# Altium PCB EXT_M_V1.PcbDoc
Units mm, origin at the board's own origin, x right, y up, seen from the top; angles counter-clockwise.
Board outline 28.17 x 19 mm, 2 copper layers (Top Layer, Bottom Layer); 3 components, 21 nets, 70 pads, 0 vias.
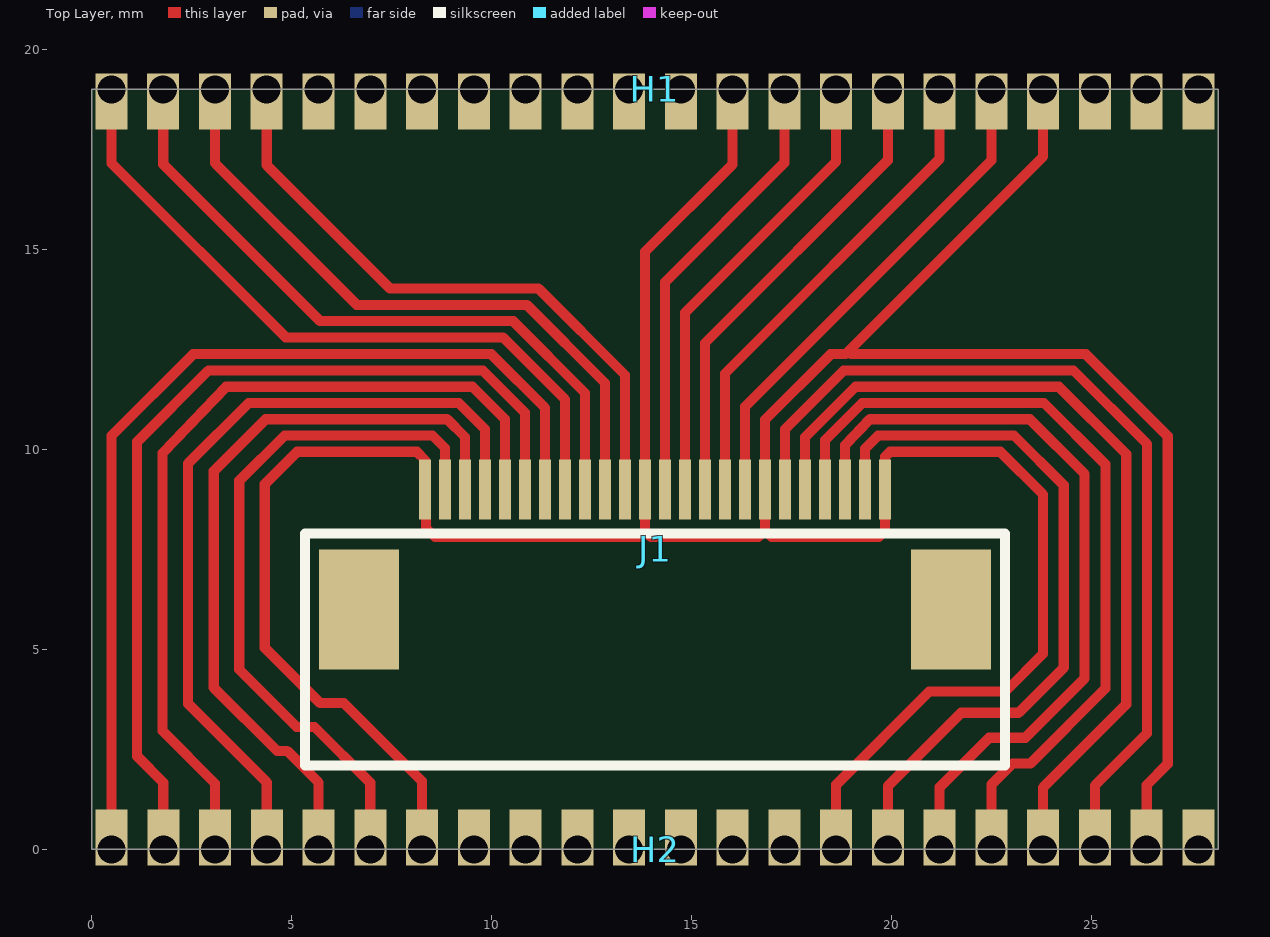
[diagram p0: Top Layer view]
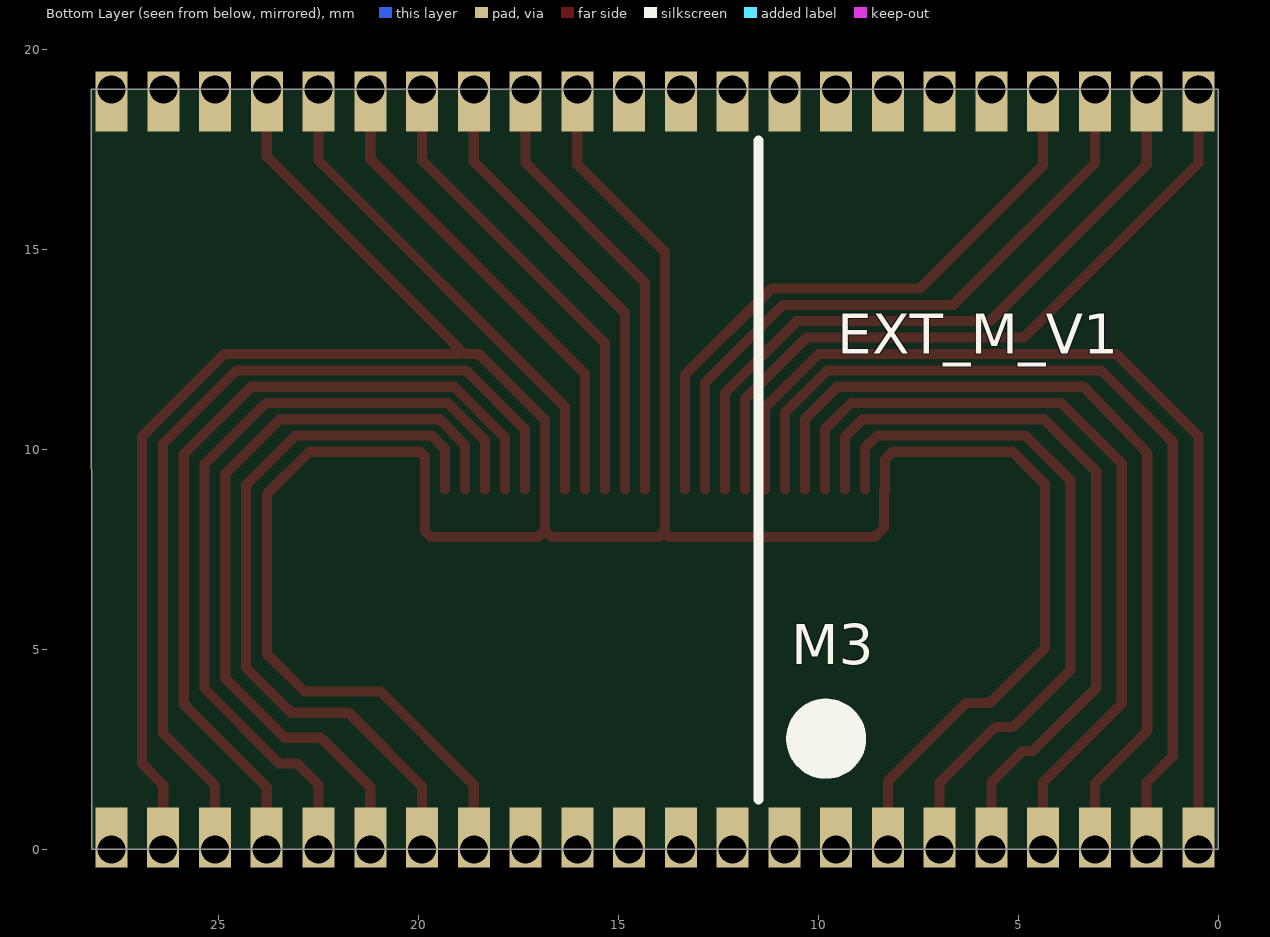
[diagram p1: Bottom Layer view, seen from below]

## Layer stack, top to bottom
Top Solder: solder mask 0.0102, Solder Resist, Dk 3.5
Top Layer: signal copper 0.0356
Dielectric 1: dielectric 0.32, FR-4, Dk 4.8
Bottom Layer: signal copper 0.0356
Bottom Solder: solder mask 0.0102, Solder Resist, Dk 3.5

## Board outline
0,0 0,19 28.173,19 28.168,0

## Design rules (kind name [scope] priority, off if disabled: settings)
AssemblyTestPointUsage SilkToBoardRegionClearance_1 [All] p2:
AssemblyTestPointUsage SilkToBoardRegionClearance [All] p3:
Clearance [All] p1: gap=0.152 ignorepadtopadclearanceinfootprint=FALSE except(0: Arc-Hole Track-Hole SMDPad-Hole THPad-Hole Via-Hole Fill-Hole Poly-Hole Region-Hole Text-Hole)
HoleSize [All] p1: absolutevalues=TRUE maxlimit=6.35 minlimit=0.3 maxpercent=80.000 minpercent=20.000
MatchedLengths DiffPair_DIFF100MatchedLengths [InDifferentialPairClass('DIFF100')] p1: tolerance=0.152 checknetsindiffpair=TRUE checkdiffpairvsdiffpair=FALSE checkxsignals=FALSE checkothers=FALSE usedelayunits=FALSE
MinimumSolderMaskSliver [All] p1: minsoldermaskwidth=0.1
MinimumSolderMaskSliver SilkscreenOverComponentPads_2 [All] p2: minsoldermaskwidth=0.254
MinimumSolderMaskSliver SilkToSolderMaskClearance_1 [IsPad] p3: minsoldermaskwidth=0.254
MinimumSolderMaskSliver SilkscreenOverComponentPads_1 [All] p4: minsoldermaskwidth=0.254
MinimumSolderMaskSliver SilkToSolderMaskClearance [IsPad] p5: minsoldermaskwidth=0.254
MinimumSolderMaskSliver SilkscreenOverComponentPads [All] p6: minsoldermaskwidth=0.254
PolygonConnect [All] p1: connectstyle=Direct reliefconductorwidth=0.254 reliefentries=4 polygonreliefangle="90 Angle" airgapwidth=0.254
RoomDefinition EXT_M_V1 [InComponentClass('EXT_M_V1')] p1: confinementstyle=ConfineIn formatcopy=TRUE lockcomponents=FALSE outline -0.102,-0.559 28.359,-0.559 28.359,19.71 -0.102,19.71
RoutingVias [All] p1: holewidth=0.305 width=0.635 viastyle="Through Hole" minholewidth=0.305 minwidth=0.635 maxholewidth=0.711 maxwidth=1.27
SilkToBoardRegionClearance SilkToBoardRegionClearance_2 [All] p1:
SilkToSolderMaskClearance SilkToSolderMaskClearance_2 [IsPad] p1: minsilkscreentomaskgap=0.254 clearancetoexposedcopper=TRUE
SolderMaskExpansion [All] p1: expansion=0.102
Width [All] p1: maxlimit=2.54 minlimit=0.152 preferedwidth=0.254
26 further rules are at their usual default settings.

## Components (designator, comment, footprint, x,y, rotation, side; value= is the part's Value field where it differs from the comment)
H1 "CASTELLATED 22P" "CASTELLATED 22P" 27.67,19 r180 top locked
H2 "CASTELLATED 22P" "CASTELLATED 22P" 0.5,0 r0 top locked
J1 "FCC 24pin 0.5mm pitch" FCC_24P_0.5MM 8.337,9 r0 top locked

## Footprints (in the part's own frame and the unit in brackets; to place one, negate y for a bottom-side part, rotate by r counter-clockwise, add the part's x,y. Pads: shape width x height; smd on the part's side, far side on the other; paste and mask are expansions set on the pad)
"CASTELLATED 22P" [mm]
  rect 0.8x1.4 / inner rect 0.8x1.5 / far side rect 0.8x1.5 hole 0.7 copper offset 0,0.3: 1(0,0) 2(1.294,0) 3(2.588,0) 4(3.881,0) 5(5.175,0) 6(6.469,0) 7(7.762,0) 8(9.056,0) 9(10.35,0) 10(11.644,0) 11(12.938,0) 12(14.232,0) 13(15.526,0) 14(16.82,0) 15(18.114,0) 16(19.408,0) 17(20.702,0) 18(21.996,0) 19(23.29,0) 20(24.584,0) 21(25.878,0) 22(27.172,0)
FCC_24P_0.5MM [mm]
  rect 0.3x1.5 smd: 1(0,0) 2(0.5,0) 3(1,0) 4(1.5,0) 5(2,0) 6(2.5,0) 7(3,0) 8(3.5,0) 9(4,0) 10(4.5,0) 11(5,0) 12(5.5,0) 13(6,0) 14(6.5,0) 15(7,0) 16(7.5,0) 17(8,0) 18(8.5,0) 19(9,0) 20(9.5,0) 21(10,0) 22(10.5,0) 23(11,0) 24(11.5,0)
  rect 2x3 smd: A(-1.65,-3) A(13.15,-3)
  silkscreen extent -3,-6.9 14.5,-1.1

## Part data
J1: library part FCC_24P_0.5MM

## Nets (pads, with @x,y where several pads share a name; then routed paths per layer and width w, separated by ;. In a path a pad name is that pad's centre, name@x,y a point inside that pad or via, vN(x,y) a via of type N, cw(c..) or ccw(c..) an arc to the next point about the centre after c; other vN are vias at no path point)
B1: H2.5 J1.3 | length 19
  Top Layer w0.254: H2.5 5.675,1.678 4.889,2.464 4.635,2.464 3.054,4.045 3.054,9.455 4.356,10.757 8.89,10.757 9.337,10.31 J1.3
B2: H2.6 J1.2 | length 17.6
  Top Layer w0.254: H2.6 6.969,1.667 5.575,3.061 5.131,3.061 3.692,4.499 3.692,9.217 4.826,10.351 8.522,10.351 8.837,10.035 J1.2
B3: H2.2 J1.6 | length 23.3
  Top Layer w0.254: H2.2 1.794,1.673 1.138,2.329 1.138,10.194 2.921,11.976 9.779,11.976 10.837,10.918 J1.6
B4: H2.4 J1.4 | length 20.3
  Top Layer w0.254: H2.4 4.381,1.677 2.415,3.643 2.415,9.652 3.927,11.163 9.182,11.163 9.837,10.508 J1.4
B5: H2.3 J1.5 | length 21.8
  Top Layer w0.254: H2.3 3.088,1.65 1.777,2.96 1.777,9.915 3.369,11.57 9.525,11.57 10.337,10.758 J1.5
GND: H1.4 H1.10 H2.7 H2.15 H2.21 J1.1 J1.12 J1.18 J1.24 | length 93
  Top Layer w0.254: H2.7 8.263,1.707 6.312,3.658 5.715,3.658 4.331,5.042 4.331,9.131 5.143,9.944 8.132,9.944 8.337,9.739 J1.1 8.36,8.977 8.36,8.036 8.585,7.81 13.737,7.81 13.837,7.91 13.837,7.956 ; H1.10 16.026,17.131 13.837,14.942 J1.12 13.837,7.956 ; H2.15 18.614,1.622 20.942,3.95 22.847,3.95 23.787,4.889 23.787,8.877 22.72,9.944 19.964,9.944 19.837,9.817 J1.24 19.837,7.963 19.685,7.81 16.999,7.81 16.837,7.972 ; 18.986,12.383 24.854,12.383 26.905,10.331 26.905,2.14 26.378,1.613 H2.21 ; H1.4 23.789,17.324 18.847,12.383 18.479,12.383 16.837,10.741 J1.18 16.837,7.972 ; 13.837,7.956 13.983,7.81 16.675,7.81 16.837,7.972
M2_D1: H2.16 J1.23 | length 18.4
  Top Layer w0.254: J1.23 19.337,10.02 19.667,10.351 23.063,10.351 24.307,9.107 24.307,4.546 23.177,3.416 21.742,3.416 19.908,1.582 H2.16
M2_D2: H2.17 J1.22 | length 19.4
  Top Layer w0.254: J1.22 18.837,10.111 19.46,10.757 23.457,10.757 24.826,9.387 24.826,4.278 23.343,2.794 22.441,2.794 21.202,1.555 H2.17
M2_D3: H2.18 J1.21 | length 20.6
  Top Layer w0.254: J1.21 18.337,10.234 19.266,11.163 23.812,11.163 25.346,9.63 25.346,4.34 ; H2.18 22.496,1.617 23.025,2.146 23.47,2.146 25.346,4.023 25.346,4.34 ; 25.349,4.572 25.349,4.343 25.346,4.34
M2_D4: H2.19 J1.20 | length 21.3
  Top Layer w0.254: J1.20 17.837,10.309 19.098,11.57 24.181,11.57 25.866,9.885 25.866,3.628 23.79,1.552 H2.19
M2_D5: H2.20 J1.19 | length 22.6
  Top Layer w0.254: J1.19 17.337,10.508 18.805,11.976 24.549,11.976 26.386,10.14 26.386,2.903 25.084,1.602 H2.20
M2_D6: H1.9 J1.13 | length 11.2
  Top Layer w0.254: J1.13 14.337,14.121 ; 14.337,14.181 17.32,17.164 H1.9
M2_D7: H1.8 J1.14 | length 11.6
  Top Layer w0.254: J1.14 14.837,13.421 18.614,17.198 H1.8
M2_D8: H1.7 J1.15 | length 11.9
  Top Layer w0.254: J1.15 15.337,12.66 19.908,17.231 ; 19.908,17.25 H1.7
M2_D9: H1.6 J1.16 | length 12.2
  Top Layer w0.254: J1.16 15.837,11.9 21.201,17.264 H1.6
M2_D10: H1.5 J1.17 | length 12.6
  Top Layer w0.254: J1.17 16.337,11.066 22.495,17.225 H1.5
M3_D1: H1.21 J1.9 | length 17.2
  Top Layer w0.254: H1.21 1.792,17.131 5.715,13.208 10.541,13.208 12.337,11.412 J1.9
M3_D2: H1.22 J1.8 | length 17.9
  Top Layer w0.254: H1.22 0.498,17.155 4.851,12.802 10.287,12.802 11.837,11.252 J1.8
M3_D7: H2.1 J1.7 | length 24.6
  Top Layer w0.254: H2.1 0.5,10.343 2.54,12.383 9.995,12.383 11.337,11.04 J1.7
VCC2: H1.19 J1.11 | length 15.9
  Top Layer w0.254: H1.19 4.38,17.109 7.468,14.021 11.176,14.021 13.337,11.86 J1.11
VCC3: H1.20 J1.10 | length 16.5
  Top Layer w0.254: H1.20 3.086,17.158 6.629,13.614 10.884,13.614 12.837,11.661 J1.10
pads on no net: H1.1 H1.2 H1.3 H1.11 H1.12 H1.13 H1.14 H1.15 H1.16 H1.17 H1.18 H2.8 H2.9 H2.10 H2.11 H2.12 H2.13 H2.14 H2.22 J1.A

## Polygon pours and split planes (outlines as drawn)
no net on Bottom Layer "NONET_L02_P000" (solid, pour order 0): 0.254,18.161
no net on Top Layer "NONET_L01_P006" (solid, pour order 6): -0.102,-0.559

## Silkscreen, mask and mechanical layers (free items; w line width, h text height)
Bottom Overlay:
  circle w1: c9.804,2.769 r0.5
  lines w0.254: 11.493,1.257 11.493,17.716
  text "EXT_M_V1" at 9.525,12.395 h1
  text "M3" at 10.681,4.635 h1
Mechanical 1:
  pour cut-out: 5.961,11.462
  lines w0.2: 0,0 0,19 28.173,19 28.168,0 0,0